# Altium PCB shahbazi2.PcbDoc
Units mm, origin at the board's own origin, x right, y up, seen from the top; angles counter-clockwise.
Board outline 151 x 86.38 mm, 2 copper layers (Top Layer, Bottom Layer); 54 components, 63 nets, 179 pads, 0 vias.
Unrouted connection lines stored in the file: 2.
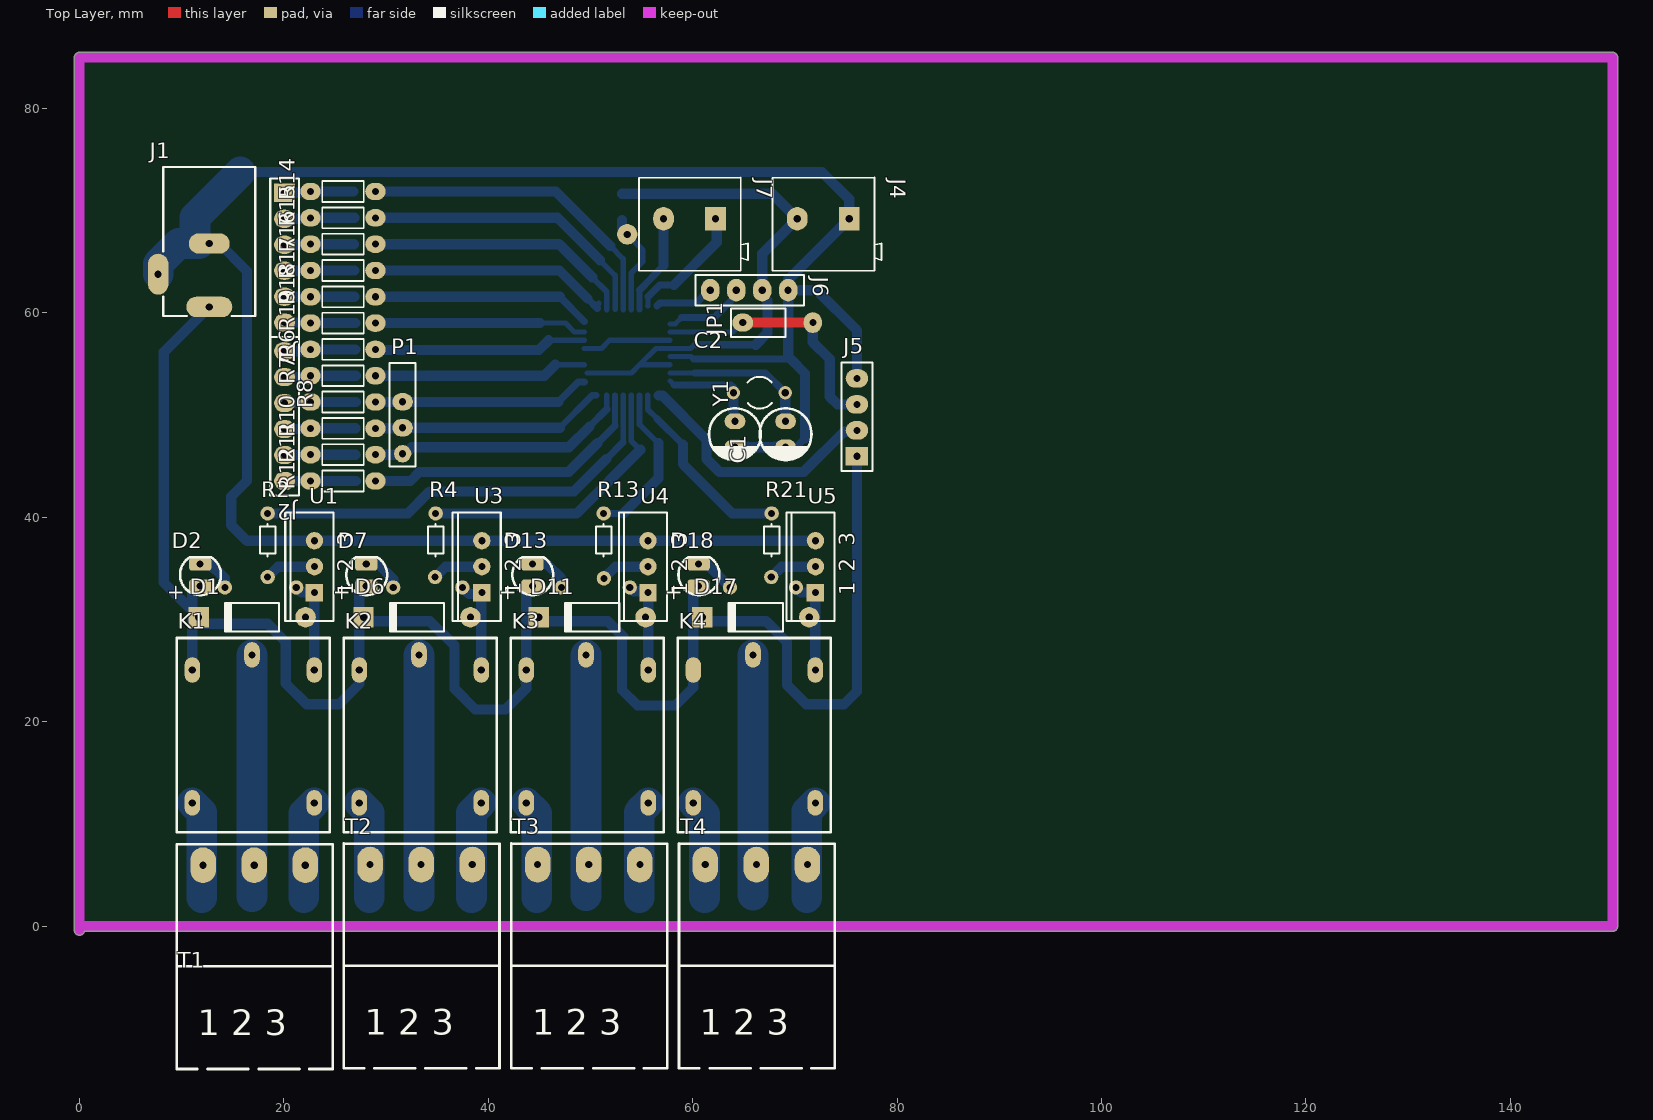
[diagram p0: Top Layer view]
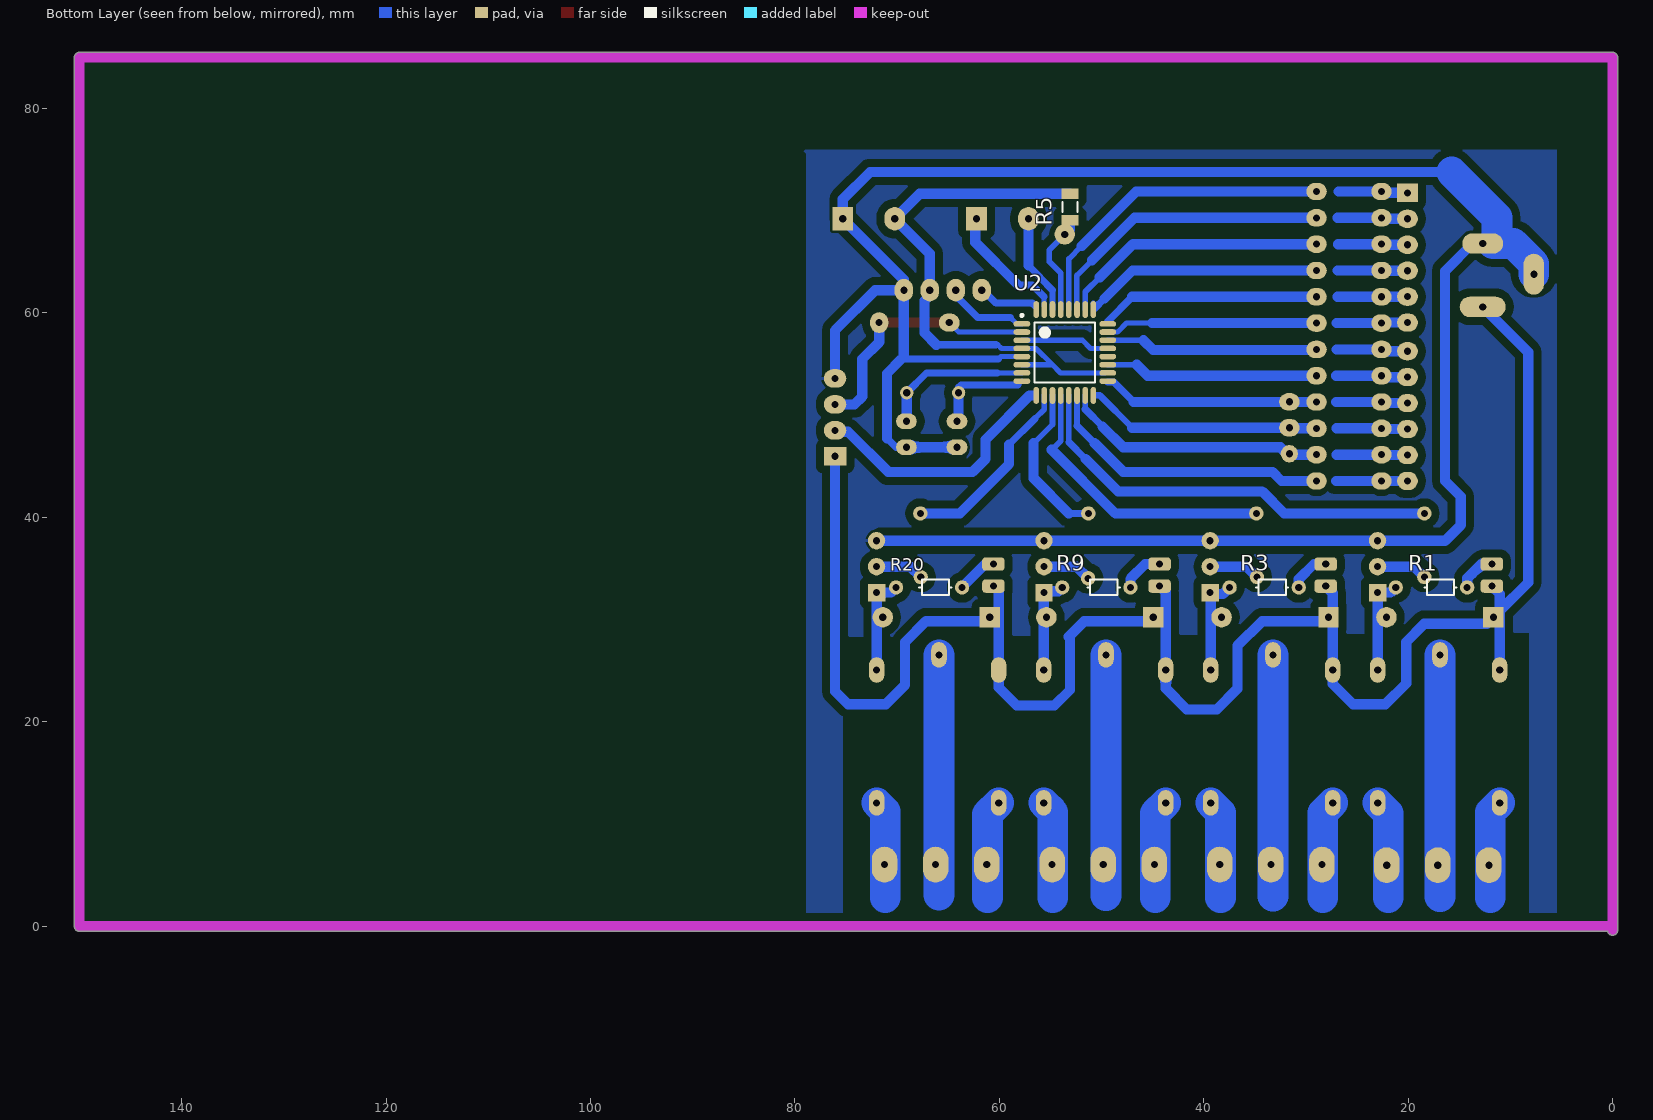
[diagram p1: Bottom Layer view, seen from below]

## Layer stack, top to bottom
Top Solder: solder mask 0.0102, Solder Resist, Dk 3.5
Top Layer: signal copper 0.0356
Dielectric 1: dielectric 0.32, FR-4, Dk 4.8
Bottom Layer: signal copper 0.0356
Bottom Solder: solder mask 0.0102, Solder Resist, Dk 3.5

## Board outline
-0.5,-0.381 -0.5,85 cw(c0,85) 0,85.5 150,85.5 cw(c150,85) 150.5,85 150.5,0 cw(c150,0) 150,-0.5 0.486,-0.5 cw(c0,-0.381)

## Design rules (kind name [scope] priority, off if disabled: settings)
Clearance Clearance_1 [InPolygon] p1: gap=0.8 ignorepadtopadclearanceinfootprint=FALSE
Clearance [All] p2: gap=0.254 ignorepadtopadclearanceinfootprint=FALSE except(0: Arc-Hole Track-Hole SMDPad-Hole THPad-Hole Via-Hole Fill-Hole Poly-Hole Region-Hole Text-Hole)
PolygonConnect [All] p1: connectstyle=Relief reliefconductorwidth=0.254 reliefentries=4 polygonreliefangle="90 Angle" airgapwidth=0.254
RoomDefinition shahbazi2 [InComponentClass('shahbazi2')] p1: confinementstyle=ConfineIn formatcopy=TRUE lockcomponents=FALSE outline 144.907,-4.953 247.904,-4.953 247.904,23.114 144.907,23.114
RoutingLayers [All] p1: top layer_v5=FALSE bottom layer_v5=TRUE
RoutingVias [All] p1: holewidth=0.711 width=2.5 viastyle="Through Hole" minholewidth=0.711 minwidth=1.27 maxholewidth=0.711 maxwidth=2
SolderMaskExpansion [All] p1: expansion=0.102
Width [All] p1: maxlimit=3 minlimit=0.5 preferedwidth=1
29 further rules are at their usual default settings.

## Components (designator, comment, footprint, x,y, rotation, side; value= is the part's Value field where it differs from the comment)
C1 "Value" ELEC-CAP-RAD10-20 69.088,48.133 r90 top
C2 "Value" ELEC-CAP-RAD10-20 64.135,48.133 r90 top
D1 "Diode 1N4007" DO-41 16.891,30.226 r180 top
D2 "LED 3mm" LED-3mm 11.938,34.29 r180 top
D6 "Diode 1N4007" DO-41 33.02,30.226 r180 top
D7 "LED 3mm" LED-3mm 28.194,34.29 r180 top
D11 "Diode 1N4007" DO-41 50.165,30.226 r180 top
D13 "LED 3mm" LED-3mm 44.45,34.29 r180 top
D17 "Diode 1N4007" DO-41 66.167,30.226 r180 top
D18 "LED 3mm" LED-3mm 60.706,34.29 r180 top
J1 "PWR2.5" KLD-0202 12.7,74.295 r270 top
J2 "Header6X1" "HEADER 6X1"#1 20.066,56.261 r270 top
J3 "Header6X1" "HEADER 6X1"#2 20.066,71.755 r270 top
J4 "TBlock-2" "KF300-2 PIN" 75.311,69.215 r270 top
J5 "Header4X1" "HEADER 4X1"#1 76.073,45.974 r90 top
J6 "Header4X1" "HEADER 4X1"#2 61.722,62.23 r0 top
J7 "TBlock-2" "KF300-2 PIN" 62.23,69.215 r270 top
JP1 "Jumper" "Header 2X1" 66.421,59.055 r180 top
K1 "Relay-12vDC" Relays#1 24.501,28.194 r180 top
K2 "Relay-12vDC" Relays#1 40.842,28.194 r180 top
K3 "Relay-12vDC" Relays#1 57.182,28.194 r180 top
K4 "Relay-12vDC" Relays#2 73.523,28.194 r180 top
P1 "Header 4" HDR1X4 31.623,46.228 r90 top
R1 "Res2" Res50#1 18.034,33.147 r0 bottom value=1K
R2 "Res2" Res50#2 18.415,36.576 r270 top value=1K
R3 "Res2" Res50#3 34.508,33.147 r0 bottom value=1K
R4 "Res2" Res50#4 34.852,36.576 r270 top value=1K
R5 "10K" "RES 1206 (3216X08L)" 53.086,70.358 r90 bottom
R6 "10K" Res-(1/4) 25.781,56.434 r180 top
R7 "10K" Res-(1/4) 25.781,53.86 r180 top
R8 "10K" Res-(1/4) 25.781,51.285 r180 top
R9 "Res2" Res50#5 50.981,33.147 r0 bottom value=1K
R10 "10K" Res-(1/4) 25.781,48.71 r180 top
R11 "10K" Res-(1/4) 25.781,46.136 r180 top
R12 "10K" Res-(1/4) 25.781,43.561 r180 top
R13 "Res2" Res50#6 51.29,36.576 r270 top value=1K
R14 "10K" Res-(1/4) 25.781,71.882 r180 top
R15 "10K" Res-(1/4) 25.781,69.307 r180 top
R16 "10K" Res-(1/4) 25.781,66.733 r180 top
R17 "10K" Res-(1/4) 25.781,64.158 r180 top
R18 "10K" Res-(1/4) 25.781,61.583 r180 top
R19 "10K" Res-(1/4) 25.781,59.009 r180 top
R20 "Res2" Res50#7 67.455,33.147 r0 bottom value=1K
R21 "Res2" Res50#8 67.727,36.576 r270 top
T1 "Terminal" "phoenix terminal R 3" 9.525,-13.97 r0 top
T2 "Terminal" "phoenix terminal R 3" 25.86,-13.906 r0 top
T3 "Terminal" "phoenix terminal R 3" 42.258,-13.906 r0 top
T4 "Terminal" "phoenix terminal R 3" 58.657,-13.906 r0 top
U1 "L4931CV30" TO-220A 22.987,35.179 r90 top
U2 "ATmega8-16AC" 32A_N 53.594,56.134 r180 bottom
U3 "L4931CV30" TO-220A 39.37,35.179 r90 top
U4 "L4931CV30" TO-220A 55.626,35.179 r90 top
U5 "L4931CV30" TO-220A 72.009,35.179 r90 top
Y1 "XTAL" R38 66.548,52.197 r90 top

## Footprints (in the part's own frame and the unit in brackets; to place one, negate y for a bottom-side part, rotate by r counter-clockwise, add the part's x,y. Pads: shape width x height; smd on the part's side, far side on the other; paste and mask are expansions set on the pad)
32A_N [mm] "Thin QFP, 32-Leads, Body 7x7mm, Pitch 0.8mm, IPC Medium Density"
  oval 1.65x0.55 smd: 1(-4.2,2.8) 2(-4.2,2) 3(-4.2,1.2) 4(-4.2,0.4) 5(-4.2,-0.4) 6(-4.2,-1.2) 7(-4.2,-2) 8(-4.2,-2.8) 17(4.2,-2.8) 18(4.2,-2) 19(4.2,-1.2) 20(4.2,-0.4) 21(4.2,0.4) 22(4.2,1.2) 23(4.2,2) 24(4.2,2.8)
  oval 0.55x1.65 smd: 9(-2.8,-4.2) 10(-2,-4.2) 11(-1.2,-4.2) 12(-0.4,-4.2) 13(0.4,-4.2) 14(1.2,-4.2) 15(2,-4.2) 16(2.8,-4.2) 25(2.8,4.2) 26(2,4.2) 27(1.2,4.2) 28(0.4,4.2) 29(-0.4,4.2) 30(-1.2,4.2) 31(-2,4.2) 32(-2.8,4.2)
  silkscreen extent -4.33,-2.95 2.95,3.75, body extent -3.5,-3.5 3.5,3.5, height 1.2
DO-41 [mm] "Diode, Axial; Body 5.2 x 2.7 mm (LxDia. max), Lead Dia. 0.86 mm (max)"
  round 2 hole 0.7: 1(-5.23,0)
  rect 2x2 hole 0.7: 2(5.23,0)
  silkscreen extent -2.65,-1.4 2.75,1.4
ELEC-CAP-RAD10-20 [mil]
  oval 60x80 hole 27.56: 1(-50,0) 2(50,0)
  silkscreen extent -100,-100 100,100, body extent -124,-124 124,124, height 404
HDR1X4 [mm] "Connector; Header; 4 Position"
  round 1.7 hole 0.7: 1(0,0)
  oval 1.7x2 hole 0.7: 2(2.54,0) 3(5.08,0)
  round 2 hole 0.7: 4(21.463,-21.971)
  silkscreen extent -1.27,-1.27 8.89,1.27
"Header 2X1" [mil]
  oval 70x80 hole 27.56: 1(-210,0)
  oval 80x70 hole 27.56: 2(60,0)
  silkscreen extent -105,-55 105,55, body extent -100,-50 100,50, height 374
"HEADER 4X1"#1 [mm]
  rect 1.8x2.2 hole 0.7: 1(0,0)
  oval 1.8x2.2 hole 0.7: 2(2.54,0) 3(5.08,0) 4(7.62,0)
  silkscreen extent -1.43,-1.5 9.18,1.5, body extent -1.19,-1.22 8.97,1.32, height 8.38
"HEADER 4X1"#2 [mm]
  oval 1.8x2.2 hole 0.7: 1(0,0) 2(2.54,0) 3(5.08,0) 4(7.62,0)
  silkscreen extent -1.43,-1.5 9.18,1.5, body extent -1.19,-1.22 8.97,1.32, height 8.38
"HEADER 6X1"#1 [mil]
  oval 70x80 hole 27.56: 1(0,0) 2(100,0) 3(200,0) 4(300,0) 5(400,0) 6(500,0)
  silkscreen extent -55,-55 555,55, body extent -52,-49 548,51, height 330
"HEADER 6X1"#2 [mil]
  rect 70x80 hole 27.56: 1(0,0)
  oval 70x80 hole 27.56: 2(100,0) 3(200,0) 4(300,0) 5(400,0) 6(500,0)
  silkscreen extent -55,-55 555,55, body extent -52,-49 548,51, height 330
"KF300-2 PIN" [mil]
  rect 90x80 hole 27.56: 1(0,0)
  oval 90x80 hole 27.56: 2(0,-200)
  silkscreen extent -160,-295 200,125, body extent -157,-295 200,127, height 493
KLD-0202 [mm] "DC Power Jack, 2.5mm, KLD Series, PCB Mount"
  oval 2x4.5 hole 0.7: 1(13.7,0)
  round 2 all layers, no hole: 1A(13.7,-1.25) 1B(13.7,1.25) 2A(7.5,-1) 2B(7.5,1) 3A(9.5,-5) 3B(11.5,-5)
  oval 2x4 hole 0.7: 2(7.5,0)
  oval 4x2 hole 0.7: 3(10.5,-5)
  silkscreen extent 0,-4.5 14.6,4.5
LED-3mm [mm] "LED; 2 Leads"
  rrect50% 2.2x1.3 hole 0.7: 1(0.127,1.016) 2(0.127,-1.143)
  silkscreen extent -1.9,-1.81 2.09,1.89
"phoenix terminal R 3" [mm] "3 Right terminals"
  oval 2.5x3.5 hole 0.7: 1(2.573,19.939) 2(7.573,19.939) 3(12.573,19.939)
  silkscreen extent 0,0 15.24,22
R38 [mm] "Crystal, Thru-Hole; 2 Leads; Body 3.1 x 8.2 mm (Dia.xH)"
  round 1.3 hole 0.7: 1(0,2.566) 2(0,-2.514)
  silkscreen extent -1.55,-1.19 1.55,1.17
Relays#1 [mil]
  oval 60x98.43 hole 27.56: 1(300,65) 2(60,635) 3(530,635) 4(60,123.11) 5(530,123.11)
  silkscreen extent 0,0 591,748
Relays#2 [mil]
  oval 60x98.43 hole 27.56: 1(300,65) 2(60,635) 3(530,635) 4(60,123.11)
  oval 60x98.43 all layers, no hole: 5(530,123.11)
  silkscreen extent 0,0 591,748
Res50#1 [mm] "50mm Pin Spacing"
  round 1.4 hole 0.7: 1(-3.81,0) 2(3.175,0)
  silkscreen extent -2.77,-0.76 0.38,0.76
Res50#2 [mm] "50mm Pin Spacing"
  round 1.4 hole 0.7: 1(-3.81,0) 2(2.413,0)
  silkscreen extent -2.77,-0.76 0.38,0.76
Res50#3 [mm] "50mm Pin Spacing"
  round 1.4 hole 0.7: 1(-3.81,0) 2(2.957,0)
  silkscreen extent -2.77,-0.76 0.38,0.76
Res50#4 [mm] "50mm Pin Spacing"
  round 1.4 hole 0.7: 1(-3.81,0) 2(2.413,-0.054)
  silkscreen extent -2.77,-0.76 0.38,0.76
Res50#5 [mm] "50mm Pin Spacing"
  round 1.4 hole 0.7: 1(-3.81,0) 2(2.867,0)
  silkscreen extent -2.77,-0.76 0.38,0.76
Res50#6 [mm] "50mm Pin Spacing"
  round 1.4 hole 0.7: 1(-3.81,0) 2(2.54,0.018)
  silkscreen extent -2.77,-0.76 0.38,0.76
Res50#7 [mm] "50mm Pin Spacing"
  round 1.4 hole 0.7: 1(-3.81,0) 2(2.649,0)
  silkscreen extent -2.77,-0.76 0.38,0.76
Res50#8 [mm] "50mm Pin Spacing"
  round 1.4 hole 0.7: 1(-3.81,0) 2(2.413,-0.036)
  silkscreen extent -2.77,-0.76 0.38,0.76
"RES 1206 (3216X08L)" [mm] "Chip Resistor, 2-Leads, Body 3.2x1.6mm, IPC High Density _ (0.125 W)"
  rect 1.05x1.7 smd: 1(-1.295,0) 2(1.301,0)
  silkscreen extent -0.5,-0.75 0.5,0.75, body extent -1.52,-0.76 1.53,0.76, height 0.6
Res-(1/4) [mm]
  oval 2x1.7 hole 0.7: 1(-3.175,0) 2(3.175,0)
  silkscreen extent -2.03,-1.02 2.03,1.02, body extent -3.43,-0.93 3.43,0.91, height 2.92
TO-220A [mm] "TO, Thru-Hole, Vertical, Heatsink Mounted; 3 In-Line Leads; Pitch 2.54 mm"
  rect 1.7x1.7 hole 0.7: 1(-2.54,0)
  round 1.7 hole 0.7: 2(0,0) 3(2.54,0)
  silkscreen extent -5.3,-1.85 5.3,2.85

## Part data
C1 C2: library part "Capacitor Electrolytic", "Electrolytic Capacitor"
D1 D6 D11 D17: "1 Amp General Purpose Rectifier", Code_JEDEC=DO-204-AL, ComponentLink1Description="Manufacturer Link", ComponentLink1URL=http://www.fairchildsemi.com/, ComponentLink2Description=Datasheet, ComponentLink2URL=http://www.fairchildsemi.com/ds/1N%2F1N4001.pdf, DatasheetVersion=1998, LatestRevisionDate=17-Jul-2002, LatestRevisionNote="Re-released for DXP Platform.", PackageDescription="Diode, Axial; Body 5.2 x 2.7 mm (LxDia. max), Lead Dia. 0.86 mm (max)", PackageReference=DO-41, PackageVersion=Aug-1999, Published=8-Jun-2000, Publisher="Altium Limited"
D2 D7 D13 D18: "Typical LED", Designer="Seyed Mohsen Ghasemian", PackageDescription="LED; 2 Leads", PackageReference=LED, Published=02/04/2012, Publisher=www.picpars.com
J1: "Low Voltage Power Supply Connector", ComponentLink1Description="Manufacturer Link", ComponentLink1URL=http://domino.kycon.com/internet/Products.html, DatasheetDocument=09-May-2002, Published=17-Dec-2003, Publisher="Altium Limited"
K1 K2 K3 K4: library part Relay-05vDC, "Relay-05vDC-240AC 5A", ComponentLinkURL=www.picpars.com, Designer="Seyed Mohsen Ghasemain"
P1: "Header, 4-Pin", LatestRevisionDate=17-Jul-2002, LatestRevisionNote="Re-released for DXP Platform.", Publisher="Altium Limited"
R1 R2 R3 R4 R9 R13 R20 R21: "Resistor", LatestRevisionDate=17-Jul-2002, LatestRevisionNote="Re-released for DXP Platform.", PackageDescription="Axial Device, Thru-Hole; 2 Leads; 0.4 in Pin Spacing", Published=8-Jun-2000, Publisher="Altium Limited"
  R1 R2 R3 R4 R13 R20 R21: PackageReference=AXIAL-0.4
  R9: PackageReference=Res50
R5 R6 R7 R8 R10 R11 R12 R14 R15 R16 R17 R18 R19: library part Resistor, "Resistor", Power="1/4 W", Tolerance=5%
T1 T2 T3 T4: library part "Terminal 1*3", "phoenix terminal R 3", ComponentLinkURL=www.picpars.com, Designer="Seyed Mohsen Ghasemain", E-mail=picpars@gmail.com
U1 U3 U4 U5: "250mA, Very Low Drop ( 0.4V) Voltage Regulator", ComponentLink1Description="Manufacturer Link", ComponentLink1URL=http://www.st.com/, ComponentLink2Description=Datasheet, ComponentLink2URL=http://www.st.com/stonline/products/literature/ds/4340/l4931abxx15.pdf, DatasheetVersion=Apr-1999, LatestRevisionDate=06-Jun-2005, LatestRevisionNote="PCB Pin sequence re-ordered.", PackageDescription="TO, Thru-Hole, Vertical, Heatsink Mounted; 3 In-Line Leads; Pitch 2.54 mm", PackageReference=TO-220A, PackageVersion=Jul-2004, Published=24-Aug-2001, Publisher="Altium Limited"
U2: "8-Bit AVR Microcontroller with 8K Bytes of In-System Programmable Flash Memory", Supplier Part Number 1=ATMEGA8-16AC-ND, Code_JEDEC=MS-026-ABA, ComponentLink1Description=Datasheet, ComponentLink1URL=http://www.atmel.com/dyn/resources/prod_documents/doc2486.pdf, ComponentLink2Description="Atmel.com Home", ComponentLink2URL=http://www.atmel.com, DatasheetVersion=2486H-AVR-09/02, LatestRevisionDate=16-Oct-2006, LatestRevisionNote="IPC-7351 Footprint Added.", PackageDescription="32-Lead, 7x7x1.0 mm Body, 0.8mm Lead Pitch, Thin Profile Plastic Quad Flat Package (TQFP)", PackageReference=32A, PackageVersion="revB, Oct-2001", Published=17-Sep-2003, Publisher="Altium Limited", Supplier 1=Digi-Key, Supplier 2=Mouser, Supplier Part Number 2=556-ATMEGA8-16AC
Y1: "Crystal Oscillator", LatestRevisionDate=17-Jul-2002, LatestRevisionNote="Re-released for DXP Platform.", PackageDescription="Crystal, Thru-Hole; 2 Leads; Body 3.1 x 8.2 mm (Dia.xH)", PackageReference=R38, Published=8-Jun-2000, Publisher="Altium Limited"

## Nets (pads, with @x,y where several pads share a name; then routed paths per layer and width w, separated by ;. In a path a pad name is that pad's centre, name@x,y a point inside that pad or via, vN(x,y) a via of type N, cw(c..) or ccw(c..) an arc to the next point about the centre after c; other vN are vias at no path point)
GND: C1.1 C2.1 J1.2 J1.2A J1.2B J1.3 J1.3A J1.3B J4.1 J5.4 J6.4 U1.3 U2.3 U2.5 U2.21 U3.3 U4.3 U5.3 | length 230.7
  Bottom Layer w0.5: U2.21 51.073,56.534 51.873,57.334 U2.3 ; U2.5 59.836,55.734 60.071,55.499
  Bottom Layer w0.7: 60.071,55.499 69.577,55.499 ; C1.1 70.104,46.863 70.993,47.752
  Bottom Layer w1: J1.2A J1.2 J1.2B 16.383,64.112 16.383,43.561 14.859,42.037 14.859,39.243 16.383,37.719 U5.3@71.537,37.719 ; 15.748,73.787 72.644,73.787 75.311,71.12 J4.1 69.342,63.246 J6.4 72.136,62.23 76.073,58.293 J5.4 ; C2.1 C1.1 ; 69.342,55.734 J6.4@69.342,61.722 ; 69.577,55.499 70.993,54.083 70.993,47.752
  Bottom Layer w3: J1.3 J1.3A 9.7,66.795 J1.2A 11.303,67.192 11.303,69.342 15.748,73.787
i1: R18.1 U2.24 | length 21.4
  Bottom Layer w0.7: 46.99,61.583 U2.24@49.394,59.179
  Bottom Layer w1: R18.1 46.99,61.583
i2: R17.1 U2.25 | length 23.8
  Bottom Layer w0.55: U2.25@50.667,60.461 U2.25@50.794,60.966
  Bottom Layer w0.7: 49.711,61.417 U2.25@50.667,60.461
  Bottom Layer w1: R17.1 46.97,64.158 49.711,61.417
i3: R16.1 U2.26 | length 26.3
  Bottom Layer w0.55: 50.165,63.5 51.594,62.071 U2.26
  Bottom Layer w1: R16.1 46.932,66.733 50.165,63.5
i4: R15.1 U2.27 | length 29.1
  Bottom Layer w0.5: U2.27 U2.27@52.415,60.355
  Bottom Layer w0.55: 50.927,65.151 52.415,63.663 U2.27@52.415,60.355
  Bottom Layer w1: R15.1 46.771,69.307 50.927,65.151
i5: R14.1 U2.28 | length 31.9
  Bottom Layer w0.5: U2.28 U2.28@53.202,60.342
  Bottom Layer w0.55: 51.943,66.548 53.194,65.297 U2.28
  Bottom Layer w1: R14.1 46.609,71.882 51.943,66.548
i6: R19.1 U2.23 | length 20.8
  Bottom Layer w0.5: 45.039,59.009 47.544,59.009 48.419,58.134 U2.23
  Bottom Layer w1: R19.1 45.039,59.009
i7: J6.1 U2.32 | length 5.6
  Bottom Layer w0.7: U2.32@56.515,60.706 56.769,60.96 60.325,60.96 61.087,61.722 J6.1@61.722,61.722
i8: J6.2 U2.1 | length 7.6
  Bottom Layer w0.5: U2.1 58.299,58.934 58.928,59.563
  Bottom Layer w0.7: 58.928,59.563 62.103,59.563 J6.2@64.262,61.722
i9: R7.1 U2.19 | length 20.9
  Bottom Layer w0.5: 46.552,54.934 U2.19
  Bottom Layer w1: R7.1 28.968,53.848 45.466,53.848 46.552,54.934
i10: R6.1 U2.22 | length 20.8
  Bottom Layer w0.5: 45.904,57.334 U2.22
  Bottom Layer w1: R6.1 29.002,56.388 44.958,56.388 45.904,57.334
NetC1_2: C1.2 U2.7 Y1.2 | length 14.9
  Bottom Layer w0.5: U2.7 60.198,54.134
  Bottom Layer w0.7: 60.198,54.134 67.125,54.134 Y1.2
  Bottom Layer w1: Y1.2 69.062,49.429 C1.2
NetC2_2: C2.2 U2.8 Y1.1 | length 9.8
  Bottom Layer w0.5: U2.8 58.169,52.959 ; Y1.1 Y1.1@63.982,52.725
  Bottom Layer w0.7: 58.169,52.959 63.748,52.959 Y1.1@63.982,52.725
  Bottom Layer w1: Y1.1 63.982,49.556 C2.2
NetD1_1: D1.1 K1.4 R1.2 U1.1 | length 8.8
  Bottom Layer w1: R1.2 21.717,32.639 U1.1 ; K1.4 U1.1@22.977,31.887
NetD2_2: D2.2 R1.1 | length 3.9
  Bottom Layer w1: D2.2 12.827,35.433 14.224,34.036 R1.1
NetD6_1: D6.1 K2.4 R3.2 U3.1 | length 9.4
  Bottom Layer w1: R3.2 38.1,32.512 U3.1@38.535,32.512 ; U3.1@39.016,32.993 39.318,32.691 K2.4
NetD7_2: D7.2 R3.1 | length 4
  Bottom Layer w1: D7.2 29.21,35.433 30.698,33.945 R3.1
NetD11_1: D11.1 K3.4 R9.2 U4.1 | length 9.3
  Bottom Layer w1: R9.2 54.229,32.766 54.973,32.766 55.658,32.08 K3.4
NetD13_2: D13.2 R9.1 | length 4.3
  Bottom Layer w1: D13.2 45.72,35.433 47.171,33.982 R9.1
NetD17_1: D17.1 K4.4 R20.2 U5.1 | length 10.1
  Bottom Layer w1: R20.2 70.612,32.639 U5.1 ; U5.1@71.41,32.512 71.537,32.639 71.999,32.177 K4.4
NetD18_2: D18.2 R20.1 | length 4
  Bottom Layer w1: D18.2 61.359,35.433 R20.1
NetJ2_1: J2.1 R6.2 | length 7
  Bottom Layer w1: J2.1 22.433,56.261 R6.2 27.005,56.434
NetJ2_2: J2.2 R7.2 | length 7
  Bottom Layer w1: J2.2 22.467,53.721 R7.2 27.039,53.86 27.051,53.848
NetJ2_3: J2.3 R8.2 | length 7
  Bottom Layer w1: J2.3 22.502,51.181 R8.2 27.028,51.285
NetJ2_4: J2.4 R10.2 | length 7
  Bottom Layer w1: J2.4 22.537,48.641 R10.2 26.993,48.71
NetJ2_5: J2.5 R11.2 | length 7
  Bottom Layer w1: J2.5 22.571,46.101 R11.2 27.016,46.136
NetJ2_6: J2.6 R12.2 | length 7
  Bottom Layer w1: J2.6 R12.2 27.051,43.561
NetJ3_1: J3.1 R14.2 | length 6.8
  Bottom Layer w1: J3.1 22.479,71.755 R14.2 26.797,71.882
NetJ3_2: J3.2 R15.2 | length 6.9
  Bottom Layer w1: J3.2 22.514,69.215 R15.2 26.889,69.307
NetJ3_3: J3.3 R16.2 | length 6.8
  Bottom Layer w1: J3.3 22.548,66.675 R16.2 26.855,66.733
NetJ3_4: J3.4 R17.2 | length 6.8
  Bottom Layer w1: J3.4 22.583,64.135 R17.2 26.901,64.158
NetJ3_5: J3.5 R18.2 | length 6.9
  Bottom Layer w1: J3.5 22.594,61.595 R18.2 26.912,61.583
NetJ3_6: J3.6 R19.2 | length 7
  Bottom Layer w1: J3.6 22.56,59.055 R19.2 27.005,59.009
NetK1_1: K1.1 T1.2 | length 23.9
  Bottom Layer w2: 16.881,2.874 16.961,2.794 ; K1.1 K1.1@16.881,26.67
  Bottom Layer w3: 16.881,2.874 K1.1
NetK1_2: K1.2 T1.3 | length 9.8
  Bottom Layer w2: K1.2 K1.2@22.977,12.192
  Bottom Layer w3: 21.961,2.794 21.961,11.049 K1.2
NetK1_3: K1.3 T1.1 | length 9.8
  Bottom Layer w2: K1.3 K1.3@11.039,12.192
  Bottom Layer w3: K1.3 11.961,11.143 11.961,2.794
NetK2_1: K2.1 T2.2 | length 23.9
  Bottom Layer w2: 33.222,2.932 33.36,2.794 ; K2.1 K2.1@33.222,26.67
  Bottom Layer w3: 33.222,2.932 K2.1
NetK2_2: K2.2 T2.3 | length 9.8
  Bottom Layer w2: K2.2 K2.2@39.318,12.192
  Bottom Layer w3: 38.36,2.794 38.36,11.107 K2.2
NetK2_3: K2.3 T2.1 | length 9.8
  Bottom Layer w2: K2.3 K2.3@27.38,12.192
  Bottom Layer w3: K2.3 28.36,11.085 28.36,2.794
NetK3_1: K3.1 T3.2 | length 24
  Bottom Layer w2: 49.562,2.99 49.758,2.794 ; K3.1 K3.1@49.562,26.67
  Bottom Layer w3: 49.562,2.99 K3.1
NetK3_2: K3.2 T3.3 | length 9.8
  Bottom Layer w2: K3.2 K3.2@55.658,12.192
  Bottom Layer w3: 54.758,2.794 54.758,11.165 K3.2
NetK3_3: K3.3 T3.1 | length 9.8
  Bottom Layer w2: K3.3 K3.3@43.72,12.192
  Bottom Layer w3: K3.3 44.758,11.027 44.758,2.794
NetK4_1: K4.1 T4.2 | length 24
  Bottom Layer w2: 65.903,3.048 66.157,2.794 ; K4.1 K4.1@65.903,26.67
  Bottom Layer w3: 65.903,3.048 K4.1
NetK4_2: K4.2 T4.3 | length 9.7
  Bottom Layer w2: K4.2 K4.2@71.999,12.192
  Bottom Layer w3: 71.157,2.794 71.157,11.223 K4.2
NetK4_3: K4.3 T4.1 | length 9.9
  Bottom Layer w2: K4.3 K4.3@60.061,12.192
  Bottom Layer w3: K4.3 61.157,10.969 61.157,2.794
NetR2_2: R2.2 U1.2 | length 5
  Bottom Layer w1: R2.2 19.431,35.179 U1.2
NetR4_2: R4.2 U3.2 | length 5
  Bottom Layer w1: R4.2 35.814,35.179 U3.2
NetR13_2: R13.2 U4.2 | length 4.8
  Bottom Layer w1: R13.2 52.451,35.179 U4.2
NetR21_2: R21.2 U5.2 | length 4.7
  Bottom Layer w1: R21.2 68.707,35.179 U5.2
O1: J5.3 JP1.1 JP1.2 U2.2 | length 25.2
  Top Layer w1: JP1.2 JP1.1
  Bottom Layer w0.5: U2.2 63.976,58.134 JP1.2
  Bottom Layer w1: JP1.1 71.755,57.15 73.406,55.499 73.406,51.816 74.168,51.054 J5.3
O2: J5.2 U2.9 | length 25.3
  Bottom Layer w1: U2.9@56.642,51.934 57.032,51.934 61.341,47.625 61.341,45.72 62.611,44.45 70.866,44.45 74.803,48.387 J5.2@76.073,48.387
O3: R21.1 U2.10 | length 18.8
  Bottom Layer w0.55: U2.10 55.594,50.578 56.515,49.657
  Bottom Layer w0.7: 56.515,49.657 59.055,47.117
  Bottom Layer w1: 59.055,47.117 59.055,45.212 63.881,40.386 R21.1
o4: R13.1 U2.11 | length 16
  Bottom Layer w0.55: U2.11 54.794,49.092 56.642,47.244
  Bottom Layer w0.65: R13.1@50.927,40.386 R13.1 53.213,40.386
  Bottom Layer w1: 53.213,40.386 56.642,43.815 56.642,47.244
o5: R4.1 U2.12 | length 28.3
  Bottom Layer w0.55: U2.12 53.994,47.479 54.864,46.609
  Bottom Layer w1: R4.1 48.641,40.386 54.864,46.609
o6: R2.1 U2.13 | length 42.2
  Bottom Layer w0.55: 53.194,47.352 U2.13
  Bottom Layer w0.7: 51.562,45.72 53.194,47.352
  Bottom Layer w1: R2.1 32.131,40.386 34.29,42.545 48.387,42.545 51.562,45.72
o7: R12.1 U2.14 | length 28.6
  Bottom Layer w0.55: 52.394,48.965 U2.14
  Bottom Layer w0.7: 50.673,47.244 52.394,48.965
  Bottom Layer w1: R12.1 32.385,43.561 33.274,44.45 47.879,44.45 50.673,47.244
o8: P1.1 R11.1 U2.15 | length 25.8
  Bottom Layer w0.55: 51.594,50.578 U2.15
  Bottom Layer w0.7: 49.911,48.895 51.594,50.578
  Bottom Layer w1: R11.1 31.277,46.136 31.369,46.228 P1.1 31.877,46.228 32.512,46.863 47.879,46.863 49.911,48.895
o9: P1.2 R10.1 U2.16 | length 22.9
  Bottom Layer w0.65: 46.99,48.768 50.156,51.934 U2.16@50.546,51.934
  Bottom Layer w1: R10.1 31.311,48.71 31.369,48.768 P1.2 46.99,48.768
o10: P1.3 R8.1 U2.17 | length 21.3
  Bottom Layer w0.7: 46.84,51.285 48.81,53.255 U2.17@49.394,53.255
  Bottom Layer w1: R8.1 31.346,51.285 P1.3@31.369,51.308 ; P1.3@31.369,51.285 46.84,51.285
rst: P1.4 R5.1 U2.29 | length 10
  Bottom Layer w0.55: P1.4 55.118,66.167 55.118,65.024 53.994,63.9 U2.29
  Bottom Layer w1: R5.1 53.086,68.199 P1.4
rx: J7.1 U2.31 | length 12.2
  Bottom Layer w0.5: 55.615,61.584 U2.31@55.615,60.692 ; U2.31@55.615,60.692 55.615,60.675 55.598,60.675 U2.31@55.615,60.692
  Bottom Layer w0.7: 55.615,61.584 56.769,62.738 58.166,62.738
  Bottom Layer w1: 58.166,62.738 62.357,66.929 J7.1@62.357,69.215
tx: J7.2 U2.30 | length 9.8
  Bottom Layer w0.55: U2.30 54.794,62.23
  Bottom Layer w0.7: 54.794,62.23 57.15,64.643
  Bottom Layer w1: 57.15,64.643 J7.2
VCC: D1.2 D2.1 D6.2 D7.1 D11.2 D13.1 D17.2 D18.1 J1.1 J1.1A J1.1B J4.2 J5.1 J6.3 K1.5 K2.5 K3.5 K4.5 R5.2 U2.4 U2.6 U2.18 | length 238.3
  Bottom Layer w0.5: U2.18@49.684,54.134 54.007,54.134 54.807,54.934 ; U2.6 54.807,54.934 ; 60.325,56.896 60.152,56.896 59.79,56.534 U2.4 56.407,56.534 54.807,54.934
  Bottom Layer w0.7: 60.325,56.896 66.167,56.896
  Bottom Layer w1: K1.5 D1.2@11.039,30.848 ; D2.1 11.039,32.502 D1.2@11.039,30.848 ; J1.1 8.255,56.15 8.255,33.632 D1.2@11.039,30.848 ; D6.2 28.171,29.845 34.29,29.845 36.703,27.432 36.703,23.241 38.735,21.209 41.656,21.209 43.72,23.273 K3.5 43.72,32.671 D13.1 ; D7.1 27.38,32.587 K2.5 27.38,23.697 25.4,21.717 22.225,21.717 20.193,23.749 20.193,27.813 18.415,29.591 12.296,29.591 D1.2 D1.2@11.039,30.848 ; D11.2 45.316,29.845 51.689,29.845 53.213,28.321 53.086,28.194 53.086,23.114 54.61,21.59 58.293,21.59 60.061,23.358 K4.5 60.061,32.756 D18.1 ; R5.2 67.787,71.659 J4.2 66.802,65.786 J6.3 66.802,61.722 67.31,61.214 67.31,58.039 66.167,56.896 ; D17.2 61.318,29.845 67.183,29.845 69.215,27.813 69.215,23.622 71.12,21.717 74.803,21.717 76.073,22.987 J5.1
pads on no net: U2.20

## Polygon pours and split planes (outlines as drawn)
GND on Bottom Layer "Bottom Layer-No Net" (solid, pour order 2): 5.461,75.946 78.994,75.946 79.121,75.819 78.867,75.565 78.867,0 5.461,0

## Keep-outs
Keep-Out Layer:
  lines w1: 0,-0.381 0,85 150,85 150,0 0,0

## Text inside footprints (layer, text, board x,y; h text height)
D2: Top Overlay "+" at 8.763,33.528 h1.52 r270
D7: Top Overlay "+" at 25.019,33.528 h1.52 r270
D13: Top Overlay "+" at 41.275,33.528 h1.52 r270
D18: Top Overlay "+" at 57.531,33.528 h1.52 r270
J1: Mechanical 1 "Alert PCB fab to slot details" at 18.766,74.009 h0.3 r270; Mechanical 1 "Assign keep-out area to slot" at 19.266,74.009 h0.3 r270; Mechanical 1 "Mech 1 - Slot cut-out" at 18.266,74.009 h0.3 r270; Mechanical 1 "Mech 2 - Clearance, move to internal plane if present" at 17.766,74.009 h0.3 r270
T1: Top Overlay "1 2 3" at 11.557,-10.668 h2.5
T2: Top Overlay "1 2 3" at 27.892,-10.604 h2.5
T3: Top Overlay "1 2 3" at 44.29,-10.604 h2.5
T4: Top Overlay "1 2 3" at 60.689,-10.604 h2.5
U1: Top Overlay "1" at 26.812,32.389 h1.5 r90; Top Overlay "2" at 26.812,34.679 h1.5 r90; Top Overlay "3" at 26.812,37.219 h1.5 r90
U3: Top Overlay "1" at 43.195,32.389 h1.5 r90; Top Overlay "2" at 43.195,34.679 h1.5 r90; Top Overlay "3" at 43.195,37.219 h1.5 r90
U4: Top Overlay "1" at 59.451,32.389 h1.5 r90; Top Overlay "2" at 59.451,34.679 h1.5 r90; Top Overlay "3" at 59.451,37.219 h1.5 r90
U5: Top Overlay "1" at 75.834,32.389 h1.5 r90; Top Overlay "2" at 75.834,34.679 h1.5 r90; Top Overlay "3" at 75.834,37.219 h1.5 r90